# EAGLE board Sensor Board A (EAGLE 8.3.0)
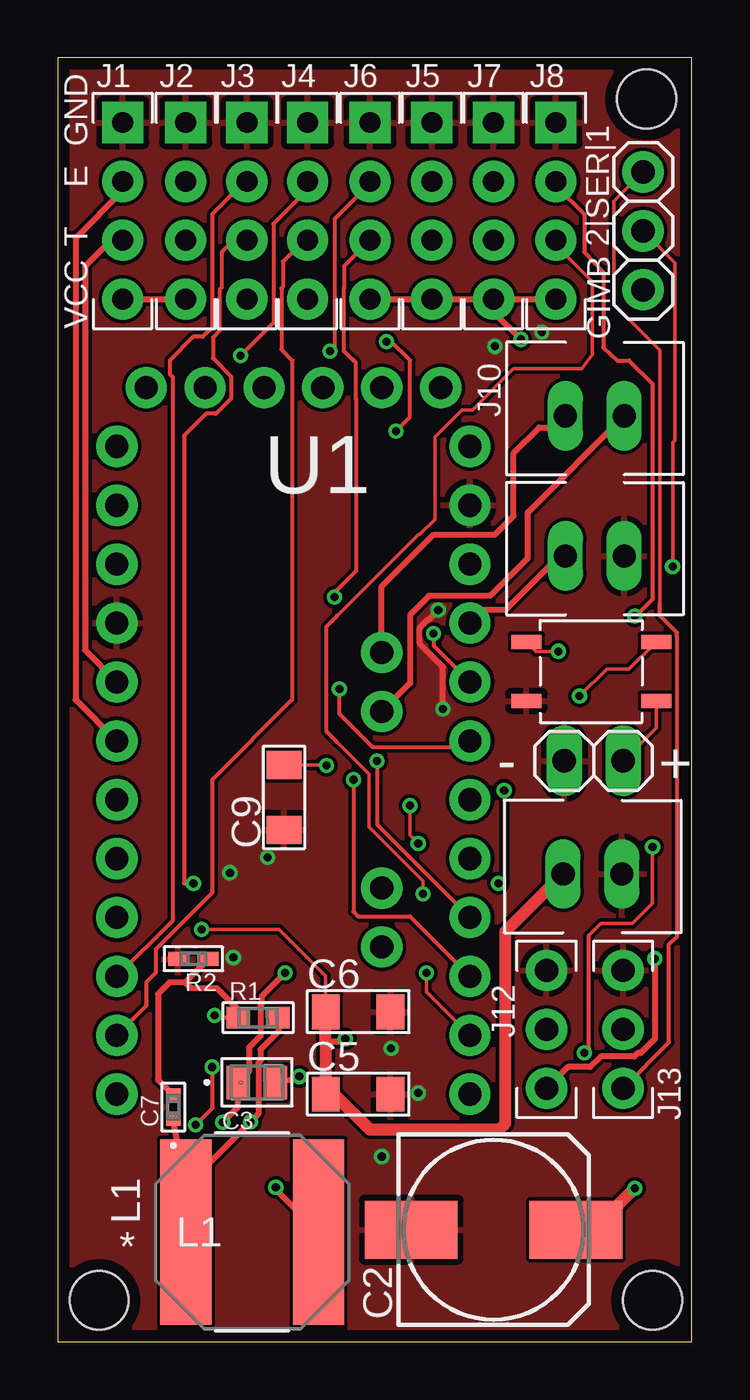
[diagram p0: board, top side]
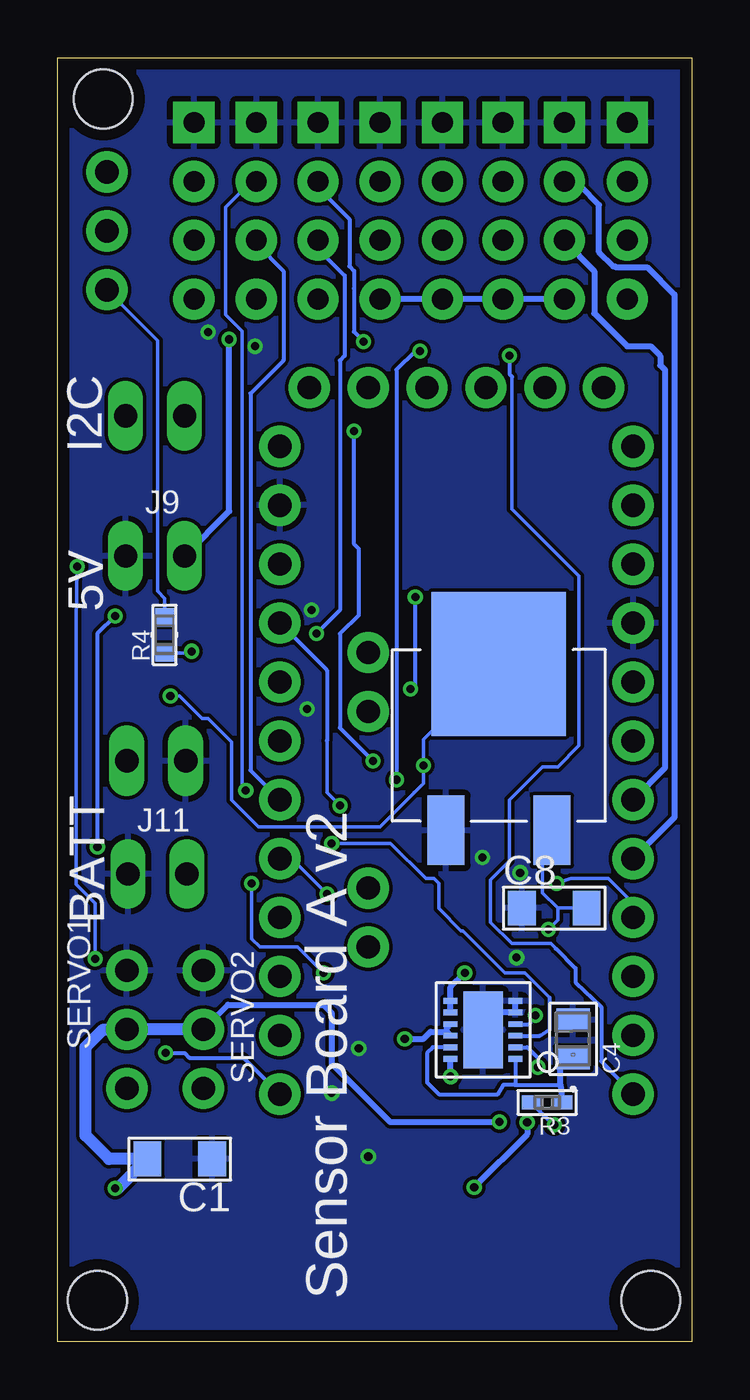
[diagram p1: board, bottom side, seen from below]

Size 27.36 x 55.36 mm. Coordinates in mm from the lower left corner, seen from the top.
Outline: 0,0 27.36,0 27.36,55.36 0,55.36 0,0
Copper layers (1*16): Top 0.035mm / dielectric 1.6mm / Bottom 0.035mm
Design rules "Elecrow_2-layer_PCB_eagle_rule": minimum track width 6mil, minimum drill 12mil, track to track 6mil, track to pad 6mil, pad to pad 6mil, via to via 8mil, smd to smd 0mil, copper to edge 20mil, drill to drill 10mil, minimum pad ring 6mil, minimum via ring 6mil, stop-mask expansion 0mil, vias tented up to drill 100mil, thermal gap 10mil
Holes 2.54 mm at 25.65,1.78 25.4,53.59 1.78,1.78

## Footprints (pad centres in the part's own frame; a part is rotated, then mirrored left to right if it is on the bottom)
1206_MLCC = smd 1.2 x 1.5: P$1 -1.4,0; P$2 1.4,0
0810_POLCAP = smd 4 x 2.5: + 3.55,0; - -3.55,0
0805 = smd 0.965 x 1.448: 1 -0.826,0; 2 0.826,0
G-155-M = smd 0.559 x 0.61: 1 -0.521,0; 2 0.521,0
HC-SR04_FOOTPRINT = drill 0.9 pad 1.778: ECHO 0,1.27; TRIG 0,-1.27; VCC 0,-3.81 | drill 0.9 pad 1.778 square: GND 0,3.81
XH_CONNECTOR = drill 1.001 long: 1 -1.27,0; 2 1.27,0
SERVO_CONNECTOR = drill 1 pad 1.778: 1 0,2.54; 2 0,0; 3 0,-2.54
1X03 = drill 1.016 pad 1.778: 1 -2.54,0; 2 0,0; 3 2.54,0
1X02 = drill 1.016 long: 1 -1.27,0; 2 1.27,0
IND_BOURNS_SRN8040 = smd 2.21 x 8.001: 1 -2.857,0; 2 2.857,0
RC0603N-M = smd 0.965 x 0.914: 1 -0.876,0; 2 0.876,0
RC0402N-M = smd 0.864 x 0.61: 1 -0.66,0; 2 0.66,0
RC0603N = smd 0.762 x 0.813: 1 -0.775,0; 2 0.775,0
PRO-MINI-2 = drill 1 pad 1.778: A0 6.35,2.54; A1 6.35,0; A2 6.35,-2.54; A3 6.35,-5.08; A4 2.54,1.27; A5 2.54,3.81; A6 2.54,-8.89; A7 2.54,-6.35; D2 -8.89,2.54; D3 -8.89,0; D4 -8.89,-2.54; D5 -8.89,-5.08; D6 -8.89,-7.62; D7 -8.89,-10.16; D8 -8.89,-12.7; D9 -8.89,-15.24; D10 6.35,-15.24; D11 6.35,-12.7; D12 6.35,-10.16; D13 6.35,-7.62; DTR 5.08,15.24; GND 6.35,10.16; GND1 -8.89,5.08; GND2 -7.62,15.24; GND3 -5.08,15.24; RAW 6.35,12.7; RST 6.35,7.62; RST1 -8.89,7.62; RX1 -8.89,10.16; RX1-1 0,15.24; TX0 -8.89,12.7; TX0-1 2.54,15.24; VCC 6.35,5.08; VCC1 -2.54,15.24
12LD4X3DFN = smd 0.6 x 0.25: 1 -1.4,1.25; 2 -1.4,0.75; 3 -1.4,0.25; 4 -1.4,-0.25; 5 -1.4,-0.75; 6 -1.4,-1.25; 7 1.4,-1.25; 8 1.4,-0.75; 9 1.4,-0.25; 10 1.4,0.25; 11 1.4,0.75; 12 1.4,1.25 | smd 1.7 x 3.3: EP 0,0
4-SOP = smd 1.3 x 0.6: 1 -2.8,1.27; 2 -2.8,-1.27; 3 2.8,-1.27; 4 2.8,1.27
DPAK = smd 1.6 x 3: 1 -2.285,0; 3 2.285,0 | smd 5.8 x 6.2: 2 0,7.18

## Placement (x,y rotation side)
C1  10uF  [1206_MLCC]  22.1,7.87 180 bottom
C2  100uF  [0810_POLCAP]  18.8,4.83 0 top
C3  0.1uF  [0805]  8.59,11.18 0 top
C4  0.1uF  [0805]  5.13,13.06 90 bottom
C5  10uF  [1206_MLCC]  12.95,10.67 0 top
C6  10uF  [1206_MLCC]  12.95,14.22 0 top
C7  16pF  [G-155-M]  4.98,10.11 90 top
C8  10uF  [1206_MLCC]  5.94,18.69 0 bottom
C9  10uF  [1206_MLCC]  9.75,23.47 90 top
J1  HC-SR04  [HC-SR04_FOOTPRINT]  2.79,48.77 0 top
J2  HC-SR04  [HC-SR04_FOOTPRINT]  5.51,48.77 0 top
J3  HC-SR04  [HC-SR04_FOOTPRINT]  8.15,48.77 0 top
J4  HC-SR04  [HC-SR04_FOOTPRINT]  10.77,48.77 0 top
J5  HC-SR04  [HC-SR04_FOOTPRINT]  16.13,48.77 0 top
J6  HC-SR04  [HC-SR04_FOOTPRINT]  13.46,48.77 0 top
J7  HC-SR04  [HC-SR04_FOOTPRINT]  18.8,48.77 0 top
J8  HC-SR04  [HC-SR04_FOOTPRINT]  21.49,48.77 0 top
J9  POWER_CONNECTOR  [XH_CONNECTOR]  23.16,33.88 0 top
J10  I2C_CONNECTOR  [XH_CONNECTOR]  23.16,39.93 0 top
J11  GIMBAL_POWER_CONNECTOR  [XH_CONNECTOR]  23.06,20.17 0 top
J12  SERVO_CONNECTOR  [SERVO_CONNECTOR]  24.38,13.46 180 top
J13  SERVO_CONNECTOR  [SERVO_CONNECTOR]  21.08,13.46 180 top
JP1  [1X03]  25.25,47.9 270 top
JP2  [1X02]  23.11,25.04 180 top
L1  3.3uH  [IND_BOURNS_SRN8040]  8.38,4.72 0 top
R1  499k  [RC0603N-M]  8.64,13.97 0 top
R2  95.3k  [RC0402N-M]  5.84,16.51 180 top
R3  95.3k  [RC0402N-M]  6.25,10.31 180 bottom
R4  340R  [RC0603N]  22.76,30.48 90 bottom
U1  PRO-MINI-2  [PRO-MINI-2]  11.43,25.91 0 top
U2  [12LD4X3DFN]  9.01,13.44 180 bottom
U3  [4-SOP]  23.01,28.91 0 top
U4  [DPAK]  8.33,22.05 0 bottom

## Library data of the parts
C1 C2 C5 C6 C8 C9 J9-J13 U2-U4 = thanics_robotics
C3 C4 = 0.1uF X7R Ceramic Capacitor; COPYRIGHT: Copyright C 2015 Accelerated Designs. All rights reserved; MANUFACTURER_PART_NUMBER: 08055C104KAT2A; VENDOR: Vendor
C7 = 16pF-capacitor; MANUFACTURER_PART_NUMBER: GRM1555C1H160JA01D; VENDOR: Murata
J1-J8 = Ultrasonic Sensor HC-SR04
JP1 JP2 = pinhead
L1 = 3.3uH-inductor
R1 = 499k-resistor; MANUFACTURER_PART_NUMBER: RC0603FR07499KL; VENDOR: Yageo
R2 R3 = 95.3k-resistor; MANUFACTURER_PART_NUMBER: RC0402FR0795K3L; VENDOR: Yageo
R4 = 340-resistor; CASE: 0603 1608 metric; COMPOSITION: Thick Film; COPYRIGHT: Copyright C 2015 Accelerated Designs. All rights reserved; DATASHEET: httpwww.yageo.comdocumentsrecentPYuRC0603_51_RoHS_L_4.pdf; DIGIKEYPARTNUMBER: 311340HRTRND; HEIGHT: 0.022" 0.55mm; LEADSTYLE: Surface Mount SMD SMT; MANUFACTURER_PART_NUMBER: RC0603FR07340RL; NEWARKPARTNUMBER: 66R2325; NUMBEROFTERMINATIONS: 2; PACKAGECASE: 0603 1608 Metric; PACKAGING: Tape &amp Reel TR; POWERWATTS: 0.1W 110W; QUANTITY_AVAILABLE: 95000; RESISTANCEINOHMS: 340; RESISTANCEOHMS: 340; SIZEDIMENSION: 0.063" L x 0.031" W 1.60mm x 0.80mm; TEMPERATURECOEFFICIENT: 100ppm°C; TOLERANCE: 1%; VENDOR: Yageo; VOLTAGEWORKING: 50V
U1 = Arduino-clone

## Nets
+5V: J1.VCC J2.VCC J3.VCC J4.VCC J5.VCC J6.VCC J7.VCC J8.VCC J9.1 U1.VCC U2.3
+12V: C9.P$2 U3.4 U4.2
ECHO1: J1.ECHO U1.D3
ECHO2: J2.ECHO U1.D5
ECHO3: J3.ECHO U1.D7
ECHO4: J4.ECHO U1.D9
ECHO5: J5.ECHO U1.D13
ECHO6: J6.ECHO U1.D12
ECHO7: J7.ECHO U1.D11
ECHO8: J8.ECHO U1.D10
GIMBAL: JP1.3 R4.2
GND: C1.P$1 C2.- C4.2 C5.P$2 C6.P$2 C8.P$1 C9.P$1 J1.GND J2.GND J3.GND J4.GND J5.GND J6.GND J7.GND J8.GND J9.2 J11.2 J12.3 J13.3 JP2.2 R2.2 U1.GND U1.GND1 U2.5 U2.6 U2.EP U3.2 U4.1
N$1: R4.1 U3.1
N$2: R3.2 U2.2
N$3: JP2.1 U3.3
N$4: C7.2 R1.1 R2.1 U2.4
N$5: C3.2 U2.12
N$6: C3.1 L1.2 U2.7 U2.8
SCL: J10.1 U1.A5
SDA: J10.2 U1.A4
SERVO1: J12.1 JP1.1
SERVO2: J13.1 JP1.2
TRIG1: J1.TRIG U1.D2
TRIG2: J2.TRIG U1.D4
TRIG3: J3.TRIG U1.D6
TRIG4: J4.TRIG U1.D8
TRIG5: J5.TRIG U1.A0
TRIG6: J6.TRIG U1.A1
TRIG7: J7.TRIG U1.A2
TRIG8: J8.TRIG U1.A3
V_BATT: C5.P$1 C6.P$1 C8.P$2 J11.1 U2.9 U2.10 U4.3
VDD: C4.1 R3.1 U2.1 U2.11
VOUT: C1.P$2 C2.+ C7.1 J12.2 J13.2 L1.1 R1.2

## Tracks (layer width: path | path; a pad name or v marks a point on that pad's centre or on a via)
+5V  (via drill 0.35)
  Top 0.152: v15.19,23.11 15.19,21.84 v15.54,21.49
  Top 0.254: J1.VCC J2.VCC | J7.VCC J5.VCC J6.VCC | J7.VCC 18.8,44.4 v19.97,43.23 | J9.1 21.64,33.88 19.3,31.55 18.34,31.55 U1.VCC | J7.VCC J8.VCC
  Bottom 0.152: 15.75,25.91 15.75,23.67 v15.19,23.11 | v15.54,21.49 13.01,21.49 11.48,19.96 11.12,19.96 10.92,19.76 10.92,18.68 9.96,17.72 9.89,17.72 8.08,15.9 7.21,15.9 6.15,14.83
  Bottom 0.178: 15.75,25.91 15.75,28.96 U1.VCC | U2.3 6.57,13.19 6.15,13.46 6.15,14.83
  Bottom 0.254: J2.VCC J3.VCC J4.VCC J6.VCC | J9.1 19.97,35.81 v19.97,43.23
+12V  (via drill 0.35)
  Top 0.152: U3.4 24.64,29.01 23.67,29.01 v22.5,27.84 | C9.P$2 11.55,24.87 v11.58,24.84
  Bottom 0.152: v22.5,27.84 22.1,27.84 21.13,26.87 20.88,26.87 19.86,25.86 19.86,23.37 18.69,22.2 13.46,22.2 12,23.67 | 12,23.67 11.99,23.67 | 12,23.67 11.58,24.08 v11.58,24.84 11.58,25.98 U4.2
ECHO1
  Top 0.254: J1.ECHO 2.79,49.63 0.76,47.6 0.76,27.69 U1.D3
ECHO2
  Bottom 0.254: U1.D5 0.76,22.61 0.76,45.16 1.93,46.33 3.28,46.33 3.33,46.38 3.4,46.38 4.01,46.99 4.01,49.02 4.83,49.84 5.31,49.84 J2.ECHO
ECHO3
  Top 0.178: J3.ECHO 8.08,50.04 6.65,48.62 6.65,43.74 6.25,43.33 5.84,43.33 4.83,42.32 4.83,41.73 4.94,41.62 4.94,18.15 U1.D7
ECHO4  (via drill 0.35)
  Top 0.178: J4.ECHO 10.77,49.68 9.3,48.21 9.3,43.94 v7.87,42.52
  Bottom 0.152: 7.76,41.62 7.76,35.9 4.88,33.02 4.88,25.71 5.79,24.79 6.45,24.79 7.87,23.37 7.87,20.73 8.69,19.91 8.69,18.09 7.77,17.17 6.1,17.17 5.88,16.95
  Bottom 0.178: v7.87,42.52 7.87,41.73 7.76,41.62 | 5.88,16.95 5.03,16.1 5.03,15.49 3.91,14.43 3.91,12.09 U1.D9
ECHO5  (via drill 0.35)
  Top 0.178: v14.17,43.13 14.38,43.13 15.18,42.32 | 15.18,42.32 15.19,42.32 | v13.77,25.04 13.77,22.3 U1.D13 | v14.58,39.27 15.18,39.87 15.18,42.32
  Bottom 0.178: J5.ECHO 16.13,49.76 14.78,48.41 14.78,46.38 14.58,46.18 14.58,45.44 14.59,45.43 14.59,43.55 v14.17,43.13 | v13.77,25.04 15.19,26.47 15.19,30.53 14.38,31.34 14.38,34.19 14.58,34.39 v14.58,39.27
ECHO6  (via drill 0.35)
  Top 0.178: J6.ECHO 13.46,49.94 11.94,48.41 11.94,42.93 v11.74,42.72 | v12.75,24.23 12.75,18.54 12.95,18.34 15.19,18.34 U1.D12
  Bottom 0.178: v11.74,42.72 11.94,42.72 12.75,41.91 v12.75,24.23
ECHO7  (via drill 0.35)
  Top 0.152: v19.25,23.77 19.25,20.02 v19,19.76 | v15.9,15.9 15.9,15.09 U1.D11
  Bottom 0.152: J7.ECHO 19,50.04 20.12,48.92 20.12,44.3 19.41,43.59 19.41,23.93 v19.25,23.77 | v19,19.76 19,17.37 18.64,17.02 17.02,17.02 v15.9,15.9
ECHO8  (via drill 0.35)
  Top 0.152: 22.91,17.53 23.42,18.03 24.79,18.03 25.65,18.9 v25.65,21.34
  Top 0.178: J8.ECHO 21.49,49.84 22.71,48.62 22.71,46.99 23.52,46.13 23.52,42.88 24.13,42.32 24.64,42.32 25.65,41.31 25.65,32 24.94,31.29 v24.89,31.29 | 22.91,17.53 22.91,12.65 v22.71,12.45
  Bottom 0.178: v22.71,12.45 21.89,12.45 21.69,12.24 19.36,12.24 U1.D10 | v24.89,31.29 25.65,30.53 v25.65,21.34
GIMBAL
  Bottom 0.152: R4.2 22.76,32.06 23.06,32.36 23.06,43.18 JP1.3
GND  (via drill 0.35)
  Top 0.254: v16.61,27.28 16.61,29.1 15.6,30.11 15.6,30.78 15.95,31.14 16,31.14 v16.41,31.55
  Bottom 0.254: U2.EP 9.01,13.59 8.38,14.22 7.65,14.22 U2.5 U2.6
  other vias: 14.38,12.65 13.97,7.98 18.85,42.93 20.88,43.54 9.04,20.88 7.42,20.22 7.57,16.56 15.54,10.72
  pour Top: 0.1,55.37 27.43,55.37 27.43,0 0.1,0
  pour Bottom: 0.05,55.32 27.33,55.32 27.33,0 0.05,0
N$1  (via drill 0.35)
  Top 0.152: v21.59,29.77 20.62,29.77 U3.1
  Bottom 0.152: R4.1 21.65,29.71 v21.59,29.77
N$2  (via drill 0.35)
  Top 0.178: v6.65,11.84 6.65,10.06 v5.94,9.35
  Bottom 0.178: R3.2 6.45,9.8 v5.94,9.35 | U2.2 7.1,12.69 6.65,12.24 v6.65,11.84
N$3
  Top 0.152: U3.3 25.81,26.47 JP2.1
N$4  (via drill 0.35)
  Top 0.178: R1.1 6.86,13.97 v6.76,14.07
  Top 0.254: 5.49,15.49 4.83,15.49 4.32,14.99 4.32,11.29 C7.2 | 5.49,15.49 R2.1 | R1.1 7.76,14.34 6.86,15.24 5.74,15.24 5.49,15.49
  Bottom 0.178: v6.76,14.07 6.86,13.87 7.06,13.67 7.59,13.67 U2.4
N$5  (via drill 0.35)
  Top 0.254: C3.2 10.21,11.33 v10.41,11.43
  Bottom 0.254: v10.41,11.43 U2.12
N$6  (via drill 0.35)
  Top 0.254: v9.8,15.9 8.79,14.88 8.79,14.58 8.75,14.54 8.75,13.19 8.24,12.68 8.24,11.66 C3.1 7.76,10.1 v7.11,9.45 | v9.4,6.66 9.4,6.57 L1.2
  Bottom 0.254: U2.8 U2.7 10.41,15.29 v9.8,15.9 | v7.11,9.45 7.11,8.94 v9.4,6.66
SCL
  Top 0.254: U1.A5 13.97,32.56 16.2,34.8 18.85,34.8 19.66,35.61 19.66,38.31 20.77,39.42 21.39,39.42 J10.1
SDA
  Top 0.254: 14.07,27.18 U1.A4 15.19,28.4 15.19,31.34 16,32.16 18.64,32.16 20.27,33.78 20.27,35.76 J10.2
SERVO1
  Top 0.152: 25.96,31.82 25.96,42.77 23.98,44.76 23.98,49.17 JP1.1
  Top 0.178: J12.1 26.37,12.9 26.37,17.12 26.72,17.47 26.72,30.38 26.7,30.4 26.7,30.57 25.96,31.31 25.96,31.82
SERVO2  (via drill 0.35)
  Top 0.152: v26.52,33.43 26.52,38.76 26.62,38.86 26.62,46.53 JP1.2
  Top 0.254: v25.76,16.51 25.76,13.06 25.15,12.45 25.02,12.45 24.87,12.29 23.41,12.29 22.96,11.84 22,11.84 J13.1
  Bottom 0.152: v25.76,16.51 25.76,18.9 26.57,19.71 26.57,31.04 v26.52,33.43
TRIG1
  Top 0.254: J1.TRIG 2.29,47.5 1.17,46.38 1.17,29.82 U1.D2
TRIG2
  Bottom 0.254: J2.TRIG 5.51,47.47 4.22,46.18 4.22,44.35 2.79,42.93 1.78,42.93 1.37,42.52 1.37,42.11 1.17,41.91 1.17,24.74 U1.D4
TRIG3  (via drill 0.35)
  Top 0.178: J3.TRIG 7.57,47.5 7.06,46.99 7.06,45.46 6.98,45.39 6.98,43.6 6.69,43.3 6.69,42.41 7.48,41.62 7.48,40.68 6.82,40.02 6.39,40.02 5.44,39.06 5.44,19.76 v5.84,19.76
  Bottom 0.152: U1.D6 2.54,18.9 3.61,19.96 5.23,19.96 v5.84,19.76
TRIG4
  Top 0.178: J4.TRIG 10.62,47.5 9.7,46.58 9.7,45.49 9.64,45.43 9.64,42.79 10.11,42.32 10.11,27.69 6.65,24.23 6.65,19.36 4.22,16.92 4.22,15.9 3.81,15.49 3.81,14.48 U1.D8
TRIG5  (via drill 0.35)
  Top 0.178: v16.2,30.53 16.2,30.02 U1.A0
  Bottom 0.178: J5.TRIG 16.13,47.12 14.99,45.97 14.99,42.52 15.19,42.32 15.19,31.55 v16.2,30.53
TRIG6  (via drill 0.35)
  Top 0.152: 12.75,42.32 12.77,42.3
  Top 0.178: J6.TRIG 12.34,46.38 12.34,45.44 12.33,45.43 12.33,42.73 12.75,42.32 | 12.75,26.47 13.11,26.11 | 13.11,26.11 13.56,25.65 17.53,25.65 U1.A1 | 12.7,42.37 12.77,42.3 12.84,42.23 12.84,40.68 12.85,40.67 12.85,33.22 11.94,32.31 v11.94,32.11 | 13.11,26.11 12.14,27.08 v12.14,28.14
  Bottom 0.178: v12.14,28.14 11.94,28.35 v11.94,32.11
TRIG7
  Bottom 0.178: J7.TRIG 18.8,47.35 17.63,46.18 17.63,42.32 19.05,40.89 19.05,24.64 U1.A2
TRIG8  (via drill 0.35)
  Top 0.152: J8.TRIG 21.49,47.3 23.06,45.72 23.06,42.57 22.61,41.96 19.66,41.96 17.88,40.18 17.42,40.18 16.26,39.01 16.26,35.46 15.6,34.8 15.54,34.8 12.04,31.29 | 12.04,25.86 13.41,24.49 13.41,22.2 15.75,19.86 v15.75,19.3
  Top 0.178: 12.04,31.29 11.57,30.83 11.57,27.91 11.58,27.9 11.58,26.31 12.04,25.86
  Bottom 0.152: v15.75,19.3 17.27,20.83 U1.A3
V_BATT  (via drill 0.35)
  Top 0.152: v6.2,17.78 9.55,17.78 11.55,15.78 C6.P$1
  Top 0.254: 11.55,12.95 12.29,12.95 v12.39,13.06
  Top 0.508: C6.P$1 11.55,12.95 C5.P$1 11.94,10.67 13.46,9.14 19.05,9.14 19.3,9.4 19.3,17.68 J11.1
  Bottom 0.152: C8.P$2 5.79,18.69 | 5.79,18.69 6.45,19.36 6.45,21.64 U4.3 | 5.79,18.69 5.79,18.19 v6.2,17.78
  Bottom 0.254: v12.39,13.06 11.58,13.06 11.28,13.36 10.58,13.36 | 10.58,13.36 U2.10 | 10.58,13.36 10.58,13.52 U2.9
VDD
  Bottom 0.178: U2.11 11.18,12.69 11.43,12.45 11.43,11.18 10.92,10.67 8.38,10.67 8.13,11.07 7.67,11.07 | 7.67,11.07 5.69,11.07 | U2.1 7.61,11.13 7.67,11.07
  Bottom 0.254: R3.1 5.69,11.07 5.69,12.28 C4.1
VOUT  (via drill 0.35)
  Top 0.254: 9.51,14.03 R1.2 9.51,13.37 8.74,12.6 8.74,12.11 8.65,12.02 8.65,9.82 v8.3,9.47 5.44,6.6 5.44,4.81 L1.1 5.53,6.66 C7.1
  Top 0.508: C2.+ 23.11,4.83 v24.89,6.6
  Bottom 0.254: J13.2 20.02,14.53 15.9,14.53 15.54,14.17 15.54,11.99 13.03,9.47 v8.3,9.47
  Bottom 0.508: v24.89,6.6 24.77,6.6 C1.P$2 25.15,7.87 26.16,8.89 26.16,12.7 25.4,13.46 J12.2 J13.2

## Text on the board
tPlace: GND | E | T | GIMB | 2|SER|1 | VCC | J10 | U1 | - | + | J12 | J13 | L1 | C2
bPlace: I2C | J9 | 5V | J11 | BATT | SERVO1 | SERVO2
bNames: Sensor Board A v2